# Altium PCB MB672.PCBDOC (part 2 of 4)
Units mil, origin at the board's own origin, x right, y up, seen from the top; angles counter-clockwise.
Board outline 4505 x 6805 mil, 4 copper layers (TopLayer, GND, VCC, BottomLayer); 337 components, 289 nets, 1516 pads, 621 vias.
Unrouted connection lines stored in the file: 28.
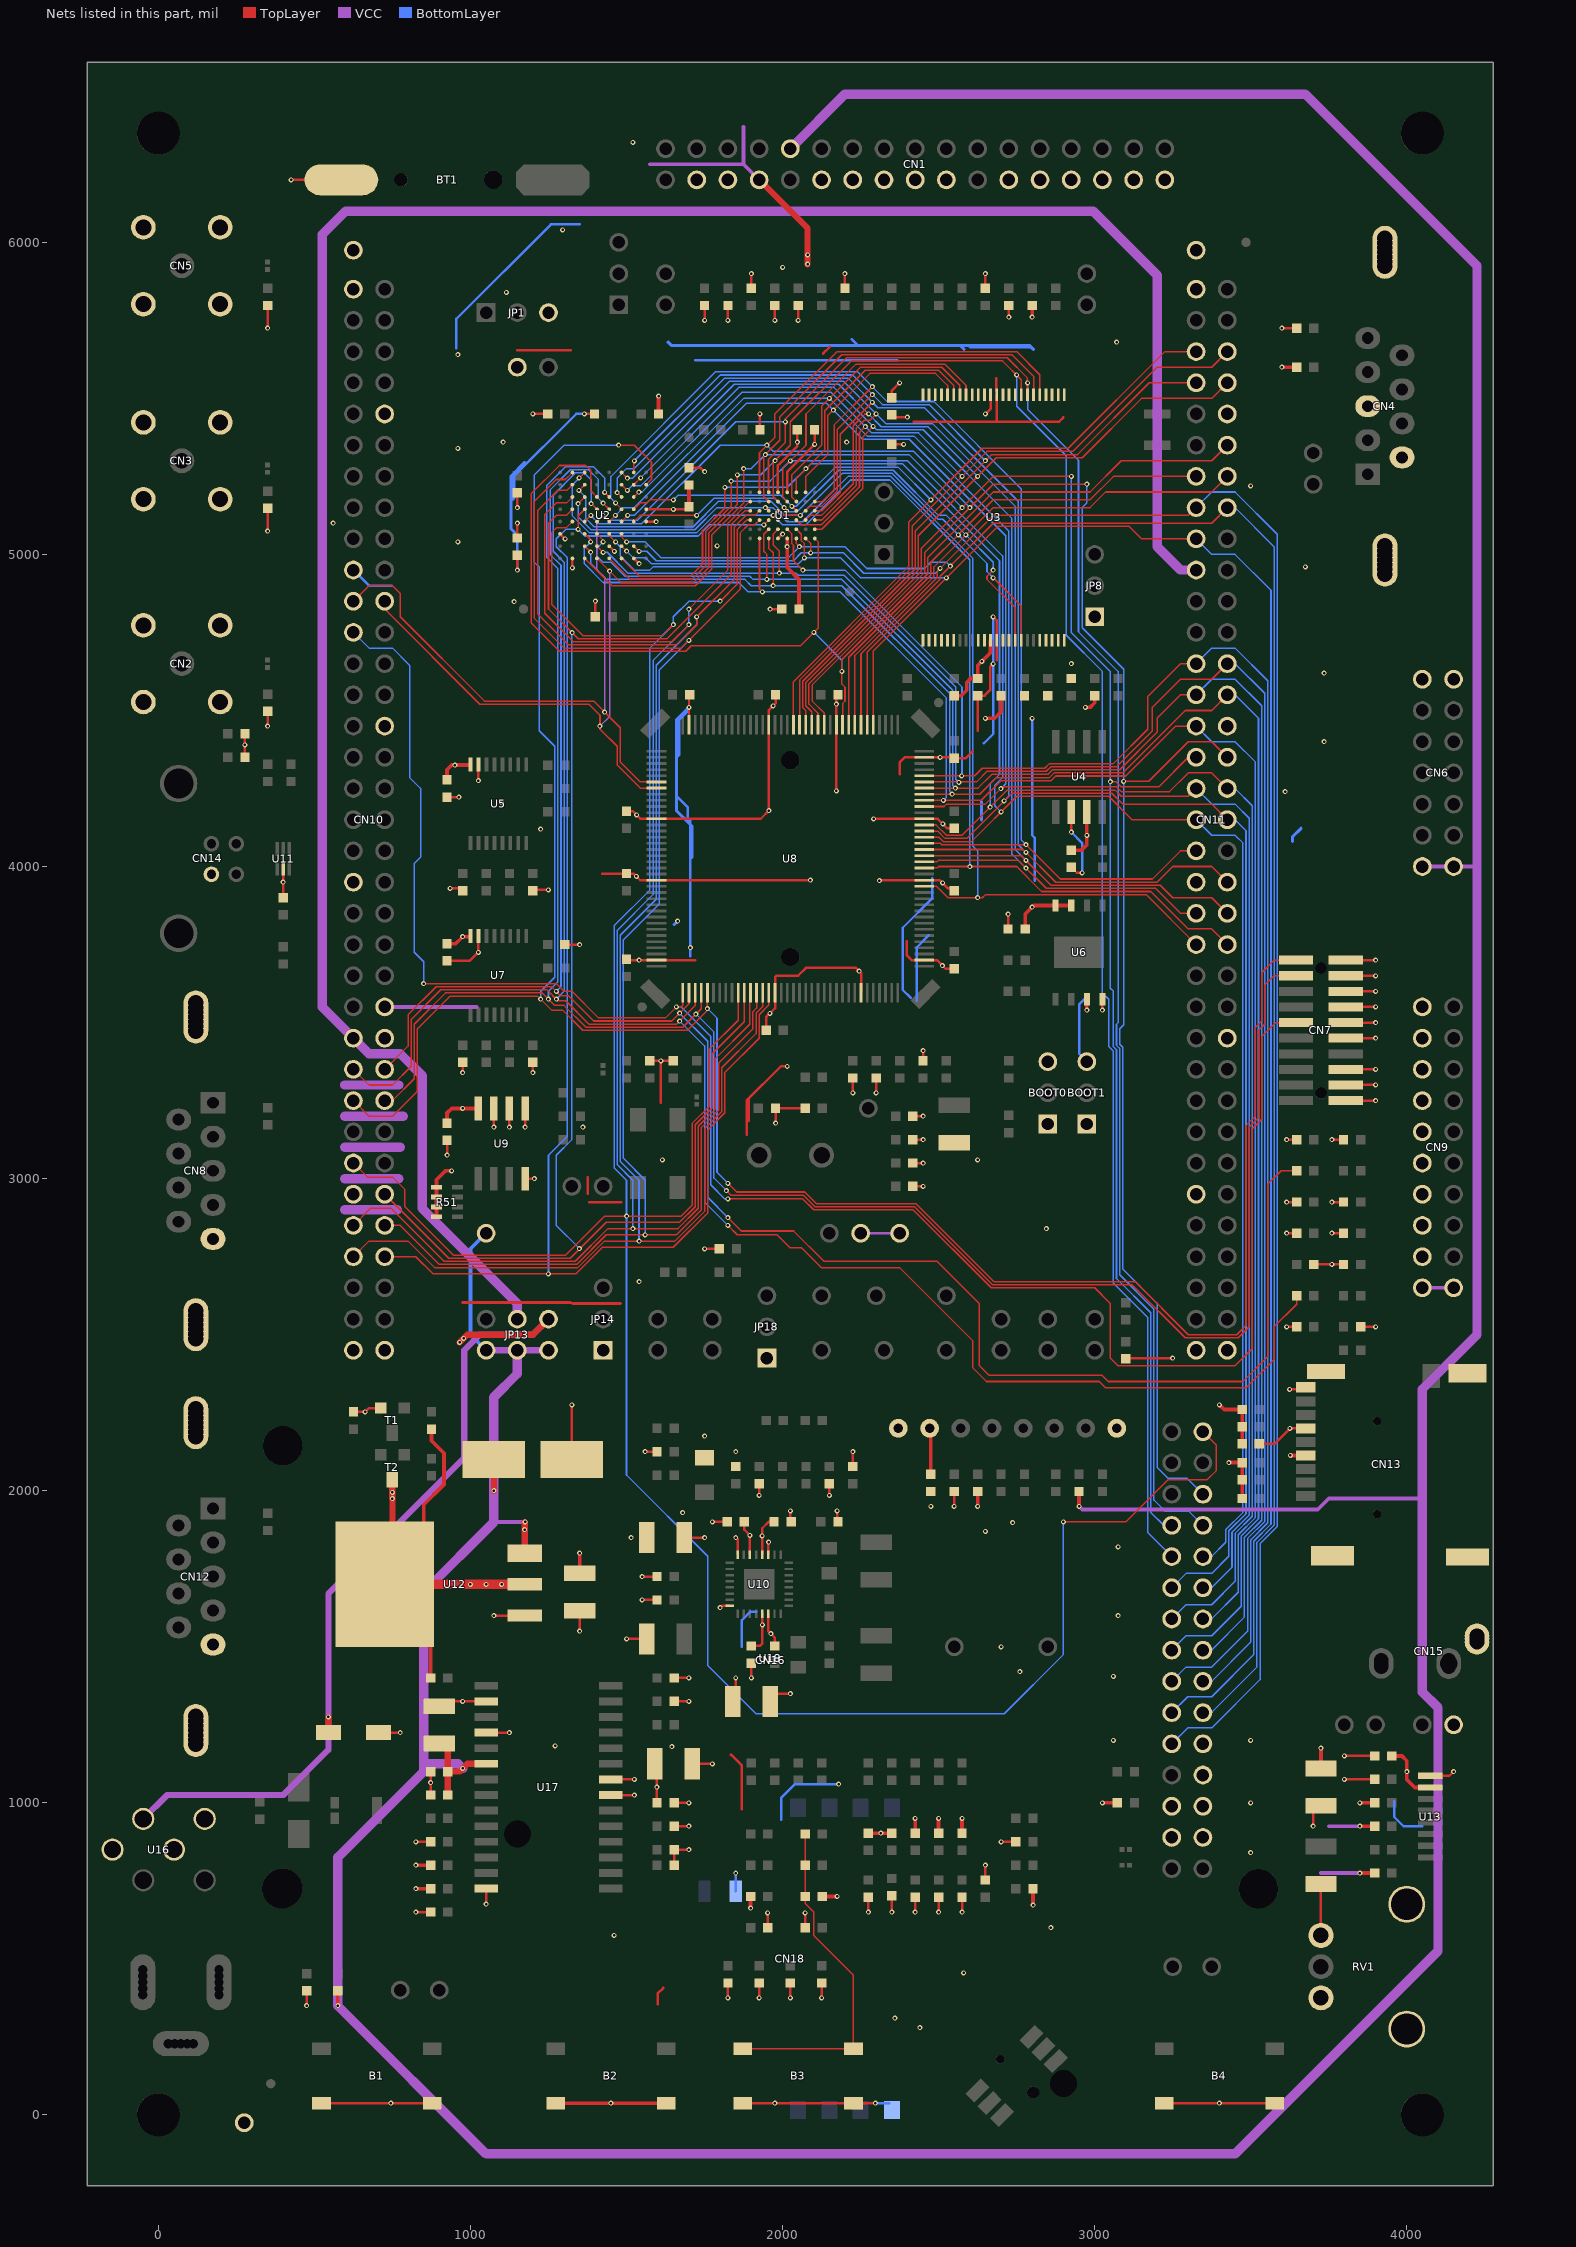
[diagram p4: the nets of this part, all layers, seen from the top]

## Via types
v1: diameter 16, hole 8, TopLayer to BottomLayer, tented both sides, 621 vias

## Nets (pads, with @x,y where several pads share a name; then routed paths per layer and width w, separated by ;. In a path a pad name is that pad's centre, name@x,y a point inside that pad or via, vN(x,y) a via of type N, cw(c..) or ccw(c..) an arc to the next point about the centre after c; other vN are vias at no path point)
+3V3: B2.1 B2.4 BOOT0.1 BOOT1.1 C11.1 C12.1 C14.2 C15.2 C16.1 C20.2 C24.2 C27.2 C34.2 C37.1 C49.2 C52.1 C62.2 C63.2 C64.1 C65.1 C68.1 C69.1 C71.1 C75.2 C79.1 C84.1 C88.2 CN1.28 CN7.1 CN9.1 CN9.2 CN10.48 CN10.69 CN11.69 CN13.4 CN16.24 CN16.25 CN16.28 JP1.3 JP12.2 R7.2 R10.1 R12.1 R13.2 R16.1 R17.2 R18.2 R19.1 R20.2 R23.2 R24.1 R27.2 R51.1 R51.3 R51.5 R51.7 R53.2 R55.2 R58.2 R59.2 R64.2 R66.2 R76.2 R83.2 R85.1 R88.2 R90.1 R91.1 R92.1 R93.1 R107.2 R109.1 R112.2 R113.1 R114.2 R115.2 R116.2 R118.1 R119.2 R120.1 R121.2 R122.2 R130.1 R131.1 R132.1 R133.1 R134.1 RV1.3 T2.3 TP5.1 U1.D6 U1.E1 U2.D8 U2.F1 U2.G5 U3.12 U3.37 U4.3 U5.16 U6.3 U6.7 U6.8 U7.16 U9.8 U10.4 U10.6 U10.8 U10.21 U12.2 U13.7 U17.21 U18.2 | length 8606.8
  TopLayer w8: v1@749.5,1975.5 v1(750,1975) ; C15.2@1150,5045 v1(1150,5100) ; v1(1150,5150) R18.2@1150,5197.5 ; v1(1200,5450) R12.1@1247.5,5450 ; U2.F1@1287.2,5065.94 v1(1303.15,5050) ; R20.2@1400,4800 v1(1400,4850) ; U2.G5@1444.68,5026.57 v1(1461.26,5010) ; U17.21@1450,1025 v1(1525,1025) ; v1(1550,1650) R83.2@1597.5,1650 ; U2.D8@1562.8,5144.69 R19.1@1704.68,5144.68 ; C88.2@1597.5,1000 C84.1@1597.5,1117.5 ; R93.1@1652.5,1325 v1(1700,1325) ; R91.1@1652.5,1400 v1(1700,1400) ; R109.1@1655,925 v1@1702.5,925 ; C65.1@1685,1850 v1(1750,1850) ; C79.1@1850,1340 v1(1850,1400) ; v1(1850,1850) 1856.1,1843.9 U10.8@1856.1,1794.49 ; C62.2@1877.5,1900 1877.5,1875 v1(1895.47,1857.03) U10.6@1895.47,1794.49 ; C75.2@1900,1502.5 1927.5,1502.5 1934.84,1509.84 U10.21@1934.84,1605.51 ; R16.1@1927.5,5400 v1(1927.5,5450) ; U10.4@1934.84,1794.49 1934.84,1879.84 1955,1900 C63.2@1972.5,1900 ; U1.D6@1985.24,5198.82 1985.24,5285.24 2047.5,5347.5 C12.1@2047.5,5400 ; R17.2@2350,5352.5 v1(2387.5,5352.5) ; C11.1@2350,5440 v1(2400,5440) ; v1(2650.1,5450.1) 2666.54,5466.54 U3.37@2666.54,5512.4 ; R58.2@3702.5,2725 R59.2@3797.5,2725 ; v1(3760,2825) R55.2@3797.5,2825 ; v1(3760,2925) R53.2@3797.5,2925 ; CN7.1@3805,3250 v1(3900,3250) ; R64.2@3852.5,2525 v1(3900,2525)
  TopLayer w12: v1(825,725) R119.2@872.5,725 ; v1(825,800) R118.1@872.5,800 ; U12.2@850,1880 850,1955 915,2020 915,2120 875,2160 R66.2@875,2197.5 ; R90.1@872.5,1400 U12.2@872.5,1527.5 ; R51.7@891.5,2877.76 891.5,2996.5 920,3025 v1(940,3025) ; C49.2@925,3177.5 925,3210 940,3225 U9.8@1025,3225 ; C37.1@925,3752.5 952.5,3752.5 v1(975,3775) U7.16@998.03,3775 ; C24.2@925,4277.5 925,4310 940,4325 U5.16@998.03,4325 ; B2.1@1272.83,37.5 B2.4@1627.17,37.5 ; C69.1@1350,1735 v1(1350,1800) ; R13.2@1602.5,5450 v1(1602.5,5507.5) ; R19.1@1700,5152.5 C14.2@1700,5222.5 ; v1(1897.5,662.5) R120.1@1897.5,700 ; U1.E1@2014.76,5051.18 2014.76,4957.74 2052.5,4920 C16.1@2052.5,4825 ; R121.2@2127.5,700 v1(2175,700) ; R112.2@2275,902.5 R113.1@2350,902.5 ; R114.2@2425,902.5 v1(2425,950) ; C64.1@2475,2052.5 U18.2@2475,2196.06 ; R115.2@2500,902.5 v1(2500,950) ; R23.2@2550,4547.5 2572.5,4547.5 2590,4565 2590,4590 2602.5,4602.5 C20.2@2625,4602.5 2625,4643.46 2666.54,4685 U3.12@2666.54,4725 ; R116.2@2575,902.5 v1(2575,950) ; v1(2625,1950) R76.2@2625,1997.5 ; v1(2650,4475) 2680,4475 2700,4495 R24.1@2700,4547.5 ; C34.2@2777.5,3800 2777.5,3847.5 2805,3875 U6.7@2925,3875 ; v1(2800,5760) R7.2@2800,5797.5 ; v1(2802.5,672.5) R122.2@2802.5,725 ; C27.2@2925,4052.5 2957.5,4052.5 2975,4070 U4.3@2975,4175 ; v1(2970,4510) 2985,4510 3000,4525 R27.2@3000,4547.5 ; v1(2975,3540) U6.3@2975,3575 ; v1(3025,1000) R107.2@3072.5,1000 ; v1(3400,2275) 3415,2260 R131.1@3472.5,2260 C52.1@3472.5,2150 ; v1(3430,2090) R134.1@3472.5,2090 R132.1@3472.5,1975 ; v1(3600,5600) R10.1@3647.5,5600 ; v1(3627.01,2112.99) CN13.4@3676.65,2112.99 ; C71.1@3725,1110 v1(3725,1175) ; v1(3850,775) R92.1@3897.5,775 ; v1(3850,925) R88.2@3897.5,925 ; v1(3850,1000) R85.1@3897.5,1000 ; C68.1@3952.5,1150 3985,1150 4000,1135 4000,1075 4025.59,1049.41 U13.7@4075,1049.41
  TopLayer w20: v1@749.5,1975.5 T2.3@749.5,2035 ; U12.2@750,1710 v1(750,1975) ; CN1.28@1925,6200 2080,6045 v1(2080,5930)
  TopLayer w30: U12.2@730,1700 U12.2@1173.82,1700
  VCC w8: JP12.2@2250,2825 TP5.1@2375,2825
  VCC w12: CN10.48@725,3550 1020,3550 ; 1575,6250 1875,6250 ; 1875,6370 1875,6250 ; CN1.28@1925,6200 1875,6250 ; 3725,775 v1(3850,775) ; 3750,925 v1(3850,925) ; CN9.2@4050,2650 CN9.1@4150,2650
  other v1: 1450,37.5 2315,902.5 1700,925 1597.5,1050 4000,1100 1935,1570 1000,1700 1050,1700 1100,1700 1934.84,1855 749.5,1995 3760,2725 975,3225 2800,3870 2975,4100 950,4325 2638.69,4657.15 2014.76,5025 1650,5144.69 2047.5,5360 2080,5960
+5V: C61.1 C82.1 C83.1 C86.1 CN1.25 CN6.1 CN6.2 JP13.1 JP13.3 JP13.5 R79.1 R127.2 TP4.1 U12.3 U17.6 | length 17048.1
  TopLayer w12: v1(575,350) R127.2@575,397.5 ; v1(2950,1950) R79.1@2950,1997.5
  TopLayer w20: C86.1@927.5,1025 C82.1@927.5,1187.5 ; C83.1@927.5,1100 965,1100 990,1125 U17.6@1050,1125 ; v1(1075,2000) C61.1@1075,2100 ; U12.3@1173.82,1800 v1@1173.82,1898.82
  VCC w12: 1075,1900 v1(1175,1900) ; v1(2950,1950) 2960,1940 3715,1940 3750,1975 4050,1975 ; CN6.2@4050,4000 4220,4000
  VCC w20: JP13.1@1050,2450 JP13.5@1250,2450
  VCC w30: 850,1125 960,1125 v1(975,1110) ; JP13.3@1150,2450 1150,2375 1075,2300 1075,1900 850,1675 850,1100 575,825 v1(575,350) 1050,-125 3450,-125 4100,525 4100,1305 4050,1355 4050,2325 4225,2500 4225,5925 3675,6475 2200,6475 CN1.25@2025,6300
  BottomLayer w12: JP13.1@1050,2450 1000,2500 1000,2775 TP4.1@1050,2825
  other v1: 1173.82,1875
A0: CN10.57 CN16.2 U1.A3 U2.E2 U8.10 | length 9253.4
  TopLayer w5: CN10.57@625,3050 670,3005 750,3005 790,2965 790,2910 945,2755 1305,2755 1430,2880 1675,2880 1710,2915 1710,3176.42 1765,3231.42 1765,3415 1857.68,3507.68 U8.10@1857.68,3595.87 ; U2.E2@1326.57,5105.32 1306.26,5085 1275,5085 1260,5070 1260,4840 1360,4740 1615,4740 v1(1649.93,4774.93) ; v1(1800,4850) 1855,4905 1855,5080 1885.24,5110.24 U1.A3@1896.65,5110.24 ; v1(2900,1900) 3100,1900 3235,2035 3360,2035 3390,2065 3390,2146 CN16.2@3347,2189
  BottomLayer w5: v1(1800,4850) 1700,4850 1649.93,4799.93 v1(1649.93,4774.93) 1575,4700 1575,3925 1460,3810 1460,3035 1500,2995 1500,2050 1760,1790 1760,1440 1915,1285 2710,1285 2900,1475 v1(2900,1900)
  other v1: 1500,2880
A1: CN10.60 U1.A4 U2.D2 U8.11 | length 5243.3
  TopLayer w5: CN10.60@725,2950 930,2745 1320,2745 1435,2860 1670,2860 1720,2910 1720,3172.28 1775,3227.28 1775,3400 1877.36,3502.36 U8.11@1877.36,3595.87 ; U2.D2@1326.57,5144.69 1306.89,5125 1275,5125 1250,5100 1250,4825 1345,4730 1630,4730 1835,4935 1835,5095 1879.76,5139.76 U1.A4@1896.65,5139.76
  BottomLayer w5: v1@1325,4748.94 1325,3125 1275,3075 1275,2850 v1(1349.13,2775.87)
  other v1: 1325.53,4749.47
A2: CN10.61 U1.A5 U2.C2 U8.12 | length 5502.1
  TopLayer w5: CN10.61@625,2850 680,2905 745,2905 915,2735 1336,2735 1441,2840 1665,2840 1730,2905 1730,3168.14 1785,3223.14 1785,3385 1895,3495 U8.12@1895,3593.82 ; U2.C2@1326.57,5184.06 1307.52,5165 1275,5165 1238.15,5128.15 1238.15,4811.85 1330,4720 1645,4720 v1(1700,4775) ; v1(1700,4825) 1825,4950 1825,5100 U1.A5@1894.29,5169.29
  BottomLayer w5: v1(1520,2840) 1520,2995 1470,3045 1470,3795 1585,3910 1585,4660 v1(1700,4775) v1(1700,4825)
A3: CN10.62 U1.B3 U2.A2 U8.13 | length 5500.2
  TopLayer w5: CN10.62@725,2850 775,2850 900,2725 1340.15,2725 1435.15,2820 1660,2820 1740,2900 1740,3164 1795,3219 1795,3370 1905,3480 1905,3535 1916.73,3546.73 U8.13@1916.73,3595.87 ; U2.A2@1326.57,5262.8 1303.78,5240 1275,5240 1205,5170 1205,4795 1300,4700 1675,4700 1865,4890 1865,5070 1890,5095 1910.94,5095 U1.B3@1926.18,5110.24
  BottomLayer w5: v1(1560,2820) 1560,2995 1490,3065 1490,3765 1605,3880 1605,4630 v1(1700,4725)
A4: CN10.63 U1.B4 U2.B2 U8.14 | length 5679.8
  TopLayer w5: CN10.63@625,2750 675,2800 800,2800 885,2715 1344.29,2715 1429.29,2800 1655,2800 1750,2895 1750,3159.85 1805,3214.85 1805,3355 1915,3465 1915,3530 1936.42,3551.42 U8.14@1936.42,3595.87 ; U2.B2@1326.57,5223.43 1308.15,5205 1280,5205 1215,5140 1215,4810 1315,4710 1660,4710 1725,4775 v1(1725,4800) 1845,4920 1845,5088.11 1881.89,5125 1911.42,5125 U1.B4@1926.18,5139.76
  BottomLayer w5: v1(1540,2800) 1540,2995 1480,3055 1480,3780 1595,3895 1595,4645 1725,4775 v1(1725,4800)
A5: CN10.64 U1.C3 U2.D3 U8.15 | length 5116.4
  TopLayer w5: CN10.64@725,2750 825,2750 880,2695 1338.43,2695 1423.43,2780 1650,2780 1760,2890 1760,3155.71 1815,3210.71 1815,3340 1925,3450 1925,3525 1956.1,3556.1 U8.15@1956.1,3595.87 ; v1(1345,5080) 1345,5123.74 U2.D3@1365.94,5144.69 ; v1(1940.47,5095) U1.C3@1955.71,5110.24
  BottomLayer w5: v1(1250,2695) 1250,3075 1310,3135 1310,4990 1275,5025 1275,5050 1305,5080 v1(1345,5080) 1366,5059 1730,5059 1766,5095 v1(1940.47,5095)
A6: CN11.43 U1.C4 U2.C3 U8.50 | length 3635.7
  TopLayer w5: v1(1345,5163.11) U2.C3@1365.94,5184.06 ; v1(1945,5150) U1.C4@1955.24,5139.76 ; U8.50@2454.13,3936.42 2493.58,3936.42 2530,3900 2640,3900 2650,3910 3165,3910 CN11.43@3325,3750
  BottomLayer w5: v1(1345,5163.11) 1345,5120 1386,5079 1719,5079 1790,5150 1968.94,5150 2013.94,5105 2065,5105 2210,5250 2346.72,5250 2610,4986.72 2610,4065 2625,4050 v1(2625,3900)
A7: CN11.44 U1.D4 U2.A3 U8.53 | length 3732.5
  TopLayer w5: v1(1348.15,5245) U2.A3@1365.94,5262.8 ; v1@1970.47,5125 U1.D4@1985.24,5139.76 ; U8.53@2454.13,3995.47 2495.47,3995.47 2500,4000 2750,4000 2830,3920 3180,3920 3300,3800 3375,3800 CN11.44@3425,3750
  BottomLayer w5: v1(1348.15,5245) 1326.57,5223.43 1326.57,5123.43 1381,5069 1724,5069 1780,5125 v1(1970,5125) 2000,5095 2075,5095 2218.57,5238.57 2344.01,5238.57 2600,4982.57 v1(2600,4000)
A8: CN11.41 U1.H2 U2.B6 U8.54 | length 4070.6
  TopLayer w5: U2.B6@1484.06,5223.43 v1(1502.48,5205) ; U1.H2@2103.35,5080.71 2125.71,5080.71 2256.54,5211.54 2256.54,5376.54 v1(2290,5410) ; U8.54@2454.13,4015.16 2495,4015.16 2499.52,4019.67 2755.33,4019.67 2845,3930 3195,3930 3275,3850 CN11.41@3325,3850
  BottomLayer w5: v1(1502.48,5205) 1517.1,5219.61 1544.61,5219.61 1860,5535 2165,5535 2300.8,5399.2 2450.8,5399.2 2735,5115 2735,4040 v1(2780,3995)
A9: CN11.42 U1.H3 U2.A6 U8.55 | length 4204.7
  TopLayer w5: U2.A6@1484.06,5262.8 v1(1502.48,5244.37) ; U1.H3@2103.35,5110.24 2125.24,5110.24 2236.54,5221.54 2236.54,5405 2261.4,5429.86 2279.86,5429.86 v1(2300.01,5449.99) ; U8.55@2454.13,4034.84 2765.16,4034.84 2860,3940 3210,3940 3250,3900 3375,3900 CN11.42@3425,3850
  BottomLayer w5: v1(1502.48,5244.37) 1519.37,5244.37 1830,5555 2195,5555 2330.8,5419.2 2480.8,5419.2 2745,5155 2745,4055 v1(2780,4020)
A10: CN11.40 U1.H4 U2.C6 U8.56 | length 4275.8
  TopLayer w5: v1(1470,5198.11) U2.C6@1484.06,5184.06 ; U1.H4@2103.35,5139.76 2125.62,5139.76 2185,5199.14 2185,5385 v1@2287.39,5487.39 ; U8.56@2454.13,4054.53 2770.47,4054.53 2875,3950 3200,3950 3250,4000 3375,4000 CN11.40@3425,3950
  BottomLayer w5: v1(1470,5198.11) 1470,5245 1500,5275 1525,5275 1815,5565 2210,5565 2305,5470 2455,5470 2755,5170 2755,4070 v1(2780,4045)
  other v1: 2287.61,5487.39
A11: CN11.37 U1.H5 U2.D6 U8.57 | length 4288.4
  TopLayer w5: v1(1465,5165) 1484.06,5145.94 U2.D6@1484.06,5144.69 ; U1.H5@2103.35,5169.29 2126.86,5169.29 2165,5207.43 2165,5415 v1(2287.5,5537.5) ; U8.57@2454.13,4074.21 2505.79,4074.21 2510,4070 v1(2780,4070) 2890,3960 3185,3960 3275,4050 CN11.37@3325,4050
  BottomLayer w5: v1(1465,5165) 1450,5180 1450,5250 1785,5585 2240,5585 2335,5490 2485,5490 2765,5210 2765,4085 v1(2780,4070)
A12: CN11.8 U1.G3 U2.B7 U8.87 | length 3764
  TopLayer w5: U2.B7@1523.43,5223.43 v1(1545,5245) ; U1.G3@2073.82,5110.24 2088.58,5125 2125,5125 2226.54,5226.54 2226.54,5412.39 2264.14,5450 v1(2275.39,5450) ; U8.87@2093.9,4454.13 2093.9,4496.1 2074.53,4515.47 2074.53,4589.67 2435,4950.15 2435,5060 2685,5310 2960,5310 3150,5500 3375,5500 CN11.8@3425,5550
  BottomLayer w5: v1(1545,5245) 1845,5545 2180,5545 v1@2275,5450 ; v1@2275.2,5449.8 2315.8,5409.2 2465.8,5409.2 v1(2625,5250)
A13: CN11.7 U1.G4 U2.A7 U8.88 | length 3742.4
  TopLayer w5: U2.A7@1523.43,5262.8 v1@1523.43,5298.43 ; U1.G4@2073.82,5139.76 2089.06,5155 2126.72,5155 2175,5203.28 2175,5400 v1@2287.21,5512.21 ; U8.88@2074.21,4454.13 2074.21,4500 2064.53,4509.68 2064.53,4593.82 2425,4954.29 2425,5075 2670,5320 2945,5320 3175,5550 CN11.7@3325,5550
  BottomLayer w5: v1(1525,5300) 1800,5575 2225,5575 2320,5480 2470,5480 2649.8,5300.2 v1(2650.2,5300.2)
  other v1: 2287.79,5512.21
A14: CN11.6 U1.F3 U2.C7 U8.89 | length 3789.6
  TopLayer w5: U2.C7@1523.43,5184.06 v1(1539.37,5200) ; U1.F3@2044.29,5110.24 2059.53,5095 2125,5095 2246.54,5216.54 2246.54,5391.24 v1@2265.16,5409.86 ; U8.89@2054.53,4454.13 2054.53,4597.96 2415,4958.43 2415,5090 2655,5330 2930,5330 3200,5600 3375,5600 CN11.6@3425,5650
  BottomLayer w5: v1(1539.37,5200) 1550,5200 1870,5520 2155,5520 2285.8,5389.2 2435.8,5389.2 v1(2575,5250)
  other v1: 2265.16,5409.84
A15: CN11.5 U1.F4 U2.D7 U8.90 | length 3052
  TopLayer w5: U2.D7@1523.43,5144.69 1543.74,5165 1565,5165 1575,5175 v1(1650,5175) ; v1(2030,5154.06) U1.F4@2044.29,5139.76 U1.F4@2044.29,5140.71 ; U8.90@2034.84,4454.13 2034.84,4592.42 2405,4962.57 2405,5105 2640,5340 2915,5340 3225,5650 CN11.5@3325,5650
  BottomLayer w5: v1(1650,5175) 1665,5190 1994.06,5190 v1(2030,5154.06) 2043.53,5154.06 2169.48,5280 2370,5280 v1(2475,5175)
A16: CN11.14 U1.E4 U2.E7 U3.16 U8.80 | length 3358.3
  TopLayer w5: U2.E7@1523.43,5105.32 1543.11,5125 v1(1725,5125) ; v1(2005,5150) 2014.76,5140.24 U1.E4@2014.76,5139.76 ; U8.80@2231.69,4454.13 2231.69,4676.13 2485,4929.44 2485,4960 2675,5150 2985,5150 3035,5200 3375,5200 CN11.14@3425,5250 ; v1(2675,4950) 2655,4930 2655,4920 2745.28,4829.72 U3.16@2745.28,4725
  BottomLayer w5: v1(1725,5125) 1780,5180 1975,5180 2017.78,5137.22 2047.22,5137.22 2180,5270 2355,5270 2500,5125 2525.01,5125 v1(2587.5,5062.5) 2675,4975 v1(2675,4950)
A17: CN11.13 U1.D3 U2.B3 U3.17 U8.81 | length 3611.8
  TopLayer w5: v1(1347.52,5205) U2.B3@1365.94,5223.43 ; U1.D3@1985.24,5110.24 2000,5125 v1(2057,5125) ; U8.81@2212.01,4454.13 2212.01,4670.59 2475,4933.58 2475,4974.56 v1(2563.09,5062.65) ; v1@2562.87,5062.87 2675,5175 2985,5175 3060,5250 CN11.13@3325,5250 ; v1(2675,4925) 2764.96,4835.04 U3.17@2764.96,4725
  BottomLayer w5: v1(1347.52,5205) 1370,5182.52 1370,5115 1396,5089 1714,5089 1795,5170 1963.08,5170 2008.08,5125 v1(2057,5125) 2192,5260 2350.86,5260 2498.01,5112.85 2512.89,5112.85 2655,4970.74 2655,4945 v1(2675,4925)
A18: CN11.12 U1.H1 U2.C4 U8.82 | length 3951
  TopLayer w5: U2.C4@1405.31,5184.06 1385,5204.37 1385,5270 1370,5285 1285,5285 1195,5195 1195,4780 1285,4690 1690,4690 1707.54,4707.54 2057.54,4707.54 2115,4765 2115,5039.53 U1.H1@2103.35,5051.18 ; U8.82@2192.32,4454.13 2192.32,4522.32 2200,4530 2200,4575 2190,4585 2190,4662.72 2465,4937.72 2465,4990 2675,5200 2985,5200 3085,5300 3375,5300 CN11.12@3425,5350
  BottomLayer w5: v1(2100.52,4750.52) 2190,4661.05 v1(2190,4625)
A19: CN10.52 R49.2 U2.D5 U8.2 | length 6656.8
  TopLayer w5: CN10.52@725,3350 800,3425 800,3525 890,3615 1260,3615 v1@1274,3601 ; v1(1275,3600) 1288.85,3586.15 1313.85,3586.15 1395,3505 1645,3505 v1(1670,3530) ; v1(1425,5164.37) U2.D5@1444.68,5144.69 ; v1@1670.1,3529.9 1700.2,3560 U8.2@1700.2,3595.87 ; v1(1825,2875) 1867.82,2832.18 2035.25,2832.18 2132.43,2735 2495,2735 2630,2600 2630,2401.57 2661.57,2370 3023.28,2370 3043.28,2350 3475,2350 3555,2430 3555,2982.5 3597.5,3025 R49.2@3647.5,3025
  BottomLayer w5: v1(1275,3600) 1290,3615 1290,4965 1255,5000 1255,5206.52 1320,5271.52 1378.48,5271.52 1410,5240 1410,5179.37 v1(1425,5164.37) ; v1(1670,3530) 1760,3440 1760,2940 v1(1825,2875)
A20: CN10.51 R60.2 U2.D4 U8.3 | length 6351
  TopLayer w5: CN10.51@625,3350 675,3300 750,3300 810,3360 810,3510 905,3605 1245,3605 1280,3570 1305,3570 1380,3495 1660,3495 1719.88,3554.88 U8.3@1719.88,3595.87 ; v1(1386.86,5163.14) U2.D4@1405.32,5144.68 ; v1(1825,2850) 1855,2820 1982.18,2820 2024.02,2778.16 2060.98,2778.16 2124.14,2715 2375,2715 2610,2480 2610,2393.28 2653.28,2350 3015,2350 3035,2330 3485,2330 3575,2420 3575,2525 3647.5,2597.5 R60.2@3647.5,2625
  BottomLayer w5: v1(1275,3575) 1300,3600 1300,4975 1265,5010 1265,5190 1336.52,5261.52 1363.48,5261.52 1386.86,5238.14 v1(1386.86,5163.14) ; v1(1670,3505) 1750,3425 1750,2925 v1(1825,2850)
A21: CN7.18 CN10.54 U2.C5 U8.4 | length 7066
  TopLayer w5: CN10.54@725,3250 750,3250 820,3320 820,3495 920,3595 1230,3595 1270,3555 1300,3555 1370,3485 1680,3485 1739.57,3544.57 U8.4@1739.57,3595.87 ; v1(1430,5198.74) U2.C5@1444.68,5184.06 ; v1(1820,2961.79) 1834.72,2947.07 2067.07,2947.07 2104.14,2910 2422.43,2910 2672.43,2660 3120,2660 3290,2490 3460,2490 3495,2525 3495,3165 3525,3195 3525,3475 3545,3495 3545,3620 3575,3650 CN7.18@3645,3650
  BottomLayer w5: v1(1250,3575) 1250,3600 1280,3630 1280,4955 1245,4990 1245,5221.52 1305,5281.52 1393.48,5281.52 1430,5245 v1(1430,5198.74) ; v1(1722.37,3527.37) 1780,3469.74 1780,3001.79 v1(1820,2961.79)
A22: CN7.20 CN10.53 U2.B8 U8.5 | length 7540.5
  TopLayer w5: CN10.53@625,3250 675,3200 750,3200 830,3280 830,3480 935,3585 1215,3585 1259.85,3540.15 1294.85,3540.15 1360,3475 1695,3475 1759.25,3539.25 U8.5@1759.25,3595.87 ; v1(1475,5350) 1525,5350 1580,5295 1580,5240.63 U2.B8@1562.8,5223.43 ; v1(1825,2985) 1852.93,2957.07 2071.21,2957.07 2108.28,2920 2426.57,2920 2676.57,2670 3130,2670 3300,2500 3455,2500 3485,2530 3485,3170 3515,3200 3515,3485 3535,3505 3535,3660 3575,3700 CN7.20@3645,3700
  BottomLayer w5: v1(1225,3575) 1225,3600 1270,3645 1270,4385 1220,4435 1220,4960 1203.91,4976.09 1203.91,5253.91 1300,5350 v1(1475,5350) ; v1(1759.25,3545) 1790,3514.25 1790,3020 v1(1825,2985)
A23: CN7.12 CN10.23 U8.1 | length 6077.9
  TopLayer w5: v1(850,3625) 1275,3625 1300,3600 1325,3600 1410,3515 1625,3515 v1(1660,3550) 1675,3550 1680.51,3555.51 U8.1@1680.51,3595.87 ; v1(1825,2935) 2065,2935 2100,2900 2418.28,2900 2668.28,2650 3000,2650 3050,2600 3050,2425 3075,2400 3450,2400 3505,2455 3505,3160 3535,3190 3535,3455 3580,3500 CN7.12@3645,3500
  BottomLayer w5: CN10.23@625,4750 675,4700 750,4700 805,4645 805,4285 840,4250 840,4030 820,4010 820,3725 850,3695 v1(850,3625) ; v1(1660,3550) 1675,3550 1770,3455 1770,2980 1815,2935 v1(1825,2935)
D0: CN11.32 CN16.6 U1.B6 U2.E3 U3.29 U8.85 | length 7918.9
  TopLayer w5: U2.E3@1365.94,5105.32 v1(1385.63,5125) ; U1.B6@1926.18,5198.82 1926.18,5326.18 1975,5375 1975,5450 2175,5650 2750,5650 2824.02,5575.98 U3.29@2824.02,5512.4 ; U8.85@2133.27,4454.13 2133.27,4491.73 2094.53,4530.47 2094.53,4581.39 2455,4941.86 2455,5005 2675,5225 v1(2975,5225) ; v1(3093.14,4273.14) 3173.14,4273.14 3300,4400 3375,4400 CN11.32@3425,4350
  BottomLayer w5: v1(1385.63,5125) 1411.63,5099 1549,5099 1800,5350 v1(1950,5350) 1970,5330 2420,5330 v1(2600,5150) ; v1(2975,5225) 2975,5165 2960,5150 2960,4765 3093.14,4631.86 3093.14,3493.14 3080,3480 3080,3430.86 3090,3420.86 3090,2710 3200,2600 3200,2075 3235,2040 3296,2040 CN16.6@3347,1989
D1: CN11.31 CN16.7 U1.C5 U2.H3 U3.30 U8.86 | length 8033.4
  TopLayer w5: U2.H3@1365.94,4987.2 1453.15,4900 1720,4900 1773.46,4953.46 1773.46,5062.61 1875,5164.14 v1(1875,5275) ; U1.C5@1955.71,5169.29 1940,5185 1940,5315 1990.61,5365.61 1990.61,5440.61 2190,5640 2735,5640 2804.33,5570.67 U3.30@2804.33,5512.4 ; U8.86@2113.58,4454.13 2113.58,4491.42 2084.53,4520.47 2084.53,4585.53 2445,4946 2445,5020 2675,5250 v1(2925,5250) ; v1(3050,4271.72) 3068.28,4271.72 3085,4255 3205,4255 3300,4350 CN11.31@3325,4350
  BottomLayer w5: v1(1875,5275) 1900,5275 v1(1944.69,5319.69) ; v1@1945,5320 2405,5320 v1(2575,5150) ; v1(2925,5250) 2925,4750 3050,4625 3050,3610 3060,3600 3060,3422.57 3070,3412.57 3070,2680 3180,2570 3180,1930 3221,1889 CN16.7@3247,1889
D2: CN10.21 CN16.8 U1.C6 U2.E4 U3.31 U8.114 | length 7894
  TopLayer w5: CN10.21@625,4850 675,4900 750,4900 775,4875 775,4800 1045,4530 1395,4530 1480,4445 1480,4335 1543.94,4271.06 U8.114@1595.87,4271.06 ; U2.E4@1405.32,5105.32 v1(1425,5125) ; U1.C6@1955,5199.53 1955,5305 2008.64,5358.64 2008.64,5433.64 2205,5630 2720,5630 2784.65,5565.35 U3.31@2784.65,5512.4
  VCC w5: v1(1425,5125) 1405,5105 1405,4950 1430,4925 v1(1430,4495)
  BottomLayer w5: v1(1425,5125) 1441,5109 1534,5109 1850,5425 v1(2008.64,5425) ; v1(2785,5550) 2785,5465 2948.2,5301.8 2948.2,4751.8 3075,4625 3075,3500 3070,3495 3070,3426.72 3080,3416.72 3080,2691.72 3190,2581.72 3190,1970 3225,1935 3301,1935 CN16.8@3347,1889
D3: CN10.22 CN16.9 U1.D5 U2.H4 U3.32 U8.115 | length 7758.6
  TopLayer w5: CN10.22@725,4850 725,4825 1030,4520 1380,4520 1414.94,4485.06 1414.94,4440.06 1470,4385 1470,4325 1543.62,4251.38 U8.115@1595.87,4251.38 ; U2.H4@1405.31,4987.2 1482.52,4910 1715,4910 1763.46,4958.46 1763.46,5068.46 1855,5160 v1(1855,5255) ; U1.D5@1985.24,5169.29 1970,5184.53 1970,5295 2025,5350 2025,5425 2220,5620 2705,5620 2764.96,5560.04 U3.32@2764.96,5512.4
  VCC w5: v1(1414.94,4450) 1446.03,4481.09 v1(1446.03,4946.49)
  BottomLayer w5: v1(1855,5255) 1930,5255 v1(1975.8,5300.8) ; v1(2750,5575) 2750,5475 2908.63,5316.37 2908.63,4741.37 3025,4625 3025,3595 3045,3575 3045,3423.43 3060,3408.43 3060,2665 3170,2555 3170,1866 CN16.9@3247,1789
D4: CN11.35 CN16.10 U1.E5 U2.H5 U3.41 U8.58 | length 6980.3
  TopLayer w5: U2.H5@1444.68,4987.2 1511.89,4920 1710,4920 1753.46,4963.46 1753.46,5072.61 1835,5154.14 v1(1835,5235) ; U1.E5@2014.76,5169.29 2000,5184.06 2000,5275 2075,5350 2075,5450 2235,5610 2520,5610 2587.8,5542.2 U3.41@2587.8,5512.4 ; U8.58@2454.13,4093.9 2501.1,4093.9 2515,4080 2605,4080 2750,4225 3045,4225 3120,4150 CN11.35@3325,4150
  BottomLayer w5: v1(1835,5235) 1960,5235 v1(2025,5300) 2400,5300 2705,4995 2705,4285 2680,4260 2680,4195 v1(2700,4175) ; CN11.35@3325,4150 3375,4100 3450,4100 3475,4075 3475,1930.56 3420,1875.56 3420,1835 3374,1789 CN16.10@3347,1789
D5: CN11.36 CN16.11 U1.F5 U2.E5 U3.42 U8.59 | length 7113.5
  TopLayer w5: U2.E5@1444.68,5105.32 v1(1464.37,5125) ; U1.F5@2044.29,5169.29 2030,5183.58 2030,5255 2125,5350 2125,5475 2250,5600 2510,5600 2568.11,5541.89 U3.42@2568.11,5512.4 ; U8.59@2454.13,4113.58 2497.28,4113.58 2520.86,4090 2590,4090 2735,4235 3055,4235 3090,4200 3375,4200 CN11.36@3425,4150
  BottomLayer w5: v1(1464.37,5125) 1489.37,5150 1525,5150 1875,5500 v1(2150,5500) 2270.8,5379.2 2420.8,5379.2 2725,5075 2725,4225 v1(2710,4210) ; CN16.11@3247,1689 3293,1735 3375,1735 3430,1790 3430,1871.42 3485,1926.42 3485,4115 3450,4150 CN11.36@3425,4150
D5V: CN10.49 CN11.19 JP13.4 | length 8491.5
  VCC w30: 596.61,2900 765,2900 ; 596.61,3000 770,3000 ; 596.61,3100 775,3100 ; 596.61,3200 785,3200 ; 596.61,3300 770,3300 ; JP13.4@1150,2550 1150,2600 845,2905 845,3330 775,3400 675,3400 525,3550 525,6025 600,6100 2995,6100 3200,5895 3200,5025 3275,4950 CN11.19@3325,4950
D6: CN11.33 CN16.12 U1.F6 U2.H6 U3.43 U8.60 | length 6948.7
  TopLayer w5: U2.H6@1484.06,4987.2 1541.26,4930 1705,4930 1743.46,4968.46 1743.46,5076.75 1815,5148.28 v1(1815,5215) ; U1.F6@2044.29,5198.82 2044.29,5244.29 2135,5335 2135,5460 2265,5590 2500,5590 2548.43,5541.57 U3.43@2548.43,5512.4 ; U8.60@2454.13,4133.27 2491.73,4133.27 2525,4100 2575,4100 2720,4245 3065,4245 3085,4225 3300,4225 CN11.33@3325,4250
  BottomLayer w5: v1(1815,5215) 2015,5215 2090,5290 2385,5290 2695,4980 2695,4295 2665,4265 v1(2665,4190) ; v1@2074.27,5275 v1(2074.64,5274.64) ; CN11.33@3325,4250 3375,4200 3450,4200 3495,4155 3495,1922.28 3440,1867.28 3440,1755 3374,1689 CN16.12@3347,1689
D7: CN11.34 CN16.13 U1.G6 U2.E6 U3.44 U8.63 | length 7053.2
  TopLayer w5: U2.E6@1484.06,5105.32 v1(1503.74,5125) ; U1.G6@2073.82,5198.82 2073.82,5248.82 2145,5320 2145,5445 2280,5580 2490,5580 2528.74,5541.26 U3.44@2528.74,5512.4 ; U8.63@2454.13,4192.32 2517.32,4192.32 2525,4200 2650,4200 2705,4255 3070,4255 3085,4240 3240,4240 3300,4300 3375,4300 CN11.34@3425,4250
  BottomLayer w5: v1(1503.74,5125) 1525,5125 1885,5485 2139.93,5485 2255.73,5369.2 2405.8,5369.2 2715,5060 2715,4265 v1(2699.83,4249.83) ; CN16.13@3247,1589 3293,1635 3375,1635 3450,1710 3450,1863.14 3505,1918.14 3505,4195 3450,4250 CN11.34@3425,4250
  other v1: 2162.47,5462.47
D8: CN11.29 CN16.14 U1.B1 U2.F3 U8.64 | length 5995.7
  TopLayer w5: U2.F3@1365.94,5065.94 1385,5046.89 v1(1385,5040) ; U1.B1@1926.18,5051.18 1926.18,4888.82 v1(1935,4880) ; U8.64@2454.13,4212.01 2637.01,4212.01 2700,4275 2860,4275 2875,4290 3100,4290 3260,4450 CN11.29@3325,4450
  BottomLayer w5: v1(1385,5040) 1365,5020 1365,4970 1425,4910 1860,4910 1890,4880 2185,4880 2525,4540 2525,4222.01 v1(2515,4212.01) ; CN11.29@3325,4450 3375,4400 3450,4400 3515,4335 3515,1914 3460,1859 3460,1675 3374,1589 CN16.14@3347,1589
D9: CN11.28 CN16.15 U1.C1 U2.G3 U8.65 | length 6253.2
  TopLayer w5: U2.G3@1365.94,5026.57 v1(1385,5007.52) ; U1.C1@1955.71,5051.18 1955.71,5019.29 1970,5005 v1(1970,4900) ; U8.65@2454.13,4231.69 2631.69,4231.69 2685,4285 2855,4285 2870,4300 3090,4300 3290,4500 3375,4500 CN11.28@3425,4550
  BottomLayer w5: v1(1385,5007.52) 1385,4970 1435,4920 1880,4920 1900,4900 2190,4900 2535,4555 2535,4240 v1(2543.31,4231.69) ; CN16.15@3247,1489 3293,1535 3375,1535 3470,1630 3470,1854.85 3525,1909.85 3525,4475 3450,4550 CN11.28@3425,4550
D10: CN11.27 CN16.16 U1.C2 U2.F4 U8.66 | length 6300.6
  TopLayer w5: U2.F4@1405.31,5065.94 1425,5046.26 v1(1425,5040) ; v1(1950,4920) 1950,5000 1940,5010 1940,5065 U1.C2@1955.71,5080.71 ; U8.66@2454.13,4251.38 2626.38,4251.38 2670,4295 2850,4295 2865,4310 3080,4310 3200,4430 3200,4475 3275,4550 CN11.27@3325,4550
  BottomLayer w5: v1(1425,5040) 1405,5020 1405,4995 1425,4975 1450,4975 1495,4930 1895,4930 1905,4920 2190,4920 2545,4565 2545,4260 v1(2553.62,4251.38) ; CN11.27@3325,4550 3375,4600 3450,4600 3535,4515 3535,1905.71 3480,1850.71 3480,1595 3374,1489 CN16.16@3347,1489
D11: CN11.26 CN16.17 U1.D2 U2.G4 U8.67 | length 6469.8
  TopLayer w5: U2.G4@1405.31,5026.57 v1(1425,5006.89) ; U1.D2@1985.24,5080.71 1970,5065.47 1970,5030 1990,5010 v1(1990,4940) ; U8.67@2454.13,4271.06 2621.06,4271.06 2655,4305 2845,4305 2860,4320 3070,4320 3185,4435 3185,4510 3275,4600 3375,4600 CN11.26@3425,4650
  BottomLayer w5: v1(1425,5006.89) 1438.11,5006.89 1505,4940 2043.39,4940 2050,4933.39 2196.61,4933.39 2555,4575 2555,4280 v1(2565,4270) ; CN16.17@3247,1389 3293,1435 3375,1435 3490,1550 3490,1846.57 3545,1901.57 3545,4555 3450,4650 CN11.26@3425,4650
D12: CN11.25 CN16.18 U1.E2 U2.F5 U8.68 | length 6482
  TopLayer w5: U2.F5@1444.68,5065.94 1444.68,5060.32 v1(1465,5040) ; U1.E2@2014.76,5080.71 2030,5065.47 2030,5035 2035,5030 2035,4980 v1(2065,4950) ; U8.68@2454.13,4290.75 2615.75,4290.75 2640,4315 2840,4315 2855,4330 3060,4330 3170,4440 3170,4545 3275,4650 CN11.25@3325,4650
  BottomLayer w5: v1(1465,5040) 1480,5025 1480,4995 1525,4950 1575,4950 1585,4960 2055,4960 v1(2065,4950) 2200,4950 2575,4575 v1@2575,4290.75 ; CN11.25@3325,4650 3375,4700 3450,4700 3555,4595 3555,1897.43 3500,1842.43 3500,1515 3374,1389 CN16.18@3347,1389
  other v1: 2574,4290.75
D13: CN11.17 CN16.19 U1.F2 U2.G6 U8.77 | length 6735.1
  TopLayer w5: U2.G6@1484.06,5026.57 v1(1500,5010.63) ; U1.F2@2044.29,5080.71 2060,5065 2060,5045 2070,5035 v1(2070,4989.21) ; U8.77@2290.75,4454.13 2290.75,4690.75 2690,5090 3110,5090 3150,5050 CN11.17@3325,5050
  BottomLayer w5: v1(1500,5010.63) 1520.63,4990 1560,4990 1580,4970 2050.79,4970 v1(2070,4989.21) 2185.79,4989.21 2250,4925 v1(2525,4925) ; CN16.19@3247,1289 3298,1340 3375,1340 3510,1475 3510,1838.28 3565,1893.28 3565,4885 3450,5000 3375,5000 CN11.17@3325,5050
D14: CN11.16 CN16.20 U1.F1 U2.F6 U8.78 | length 6809.7
  TopLayer w5: U2.F6@1484.06,5065.94 1484.06,5055.94 v1(1500,5040) ; U1.F1@2044.29,5051.18 2044.29,5034.71 v1(2054,5025) ; U8.78@2271.06,4454.13 2271.06,4687.21 2505,4921.15 2505,4930 v1@2537.5,4962.5 ; v1(2537.33,4962.67) 2537.67,4962.67 2675,5100 3375,5100 CN11.16@3425,5150
  BottomLayer w5: v1(1500,5040) 1560,5040 1610,4990 2019,4990 v1(2054,5025) 2200,5025 2270,4955 2455,4955 2475,4975 2525,4975 v1(2537.33,4962.67) ; CN16.20@3347,1289 3374,1289 3520,1435 3520,1834.14 3575,1889.14 3575,5025 3450,5150 CN11.16@3425,5150
D15: CN11.15 CN16.21 U1.G1 U2.G7 U8.79 | length 7001.7
  TopLayer w5: U2.G7@1523.43,5026.57 v1(1540,5010) ; U1.G1@2073.82,5051.18 2090,5035 v1(2090,5005) ; U8.79@2251.38,4454.13 2251.38,4681.67 2495,4925.29 2495,4945 2675,5125 3300,5125 CN11.15@3325,5150
  BottomLayer w5: v1(1540,5010) 1565,5010 1595,4980 2035,4980 2060,5005 2195,5005 2260,4940 2490,4940 v1(2505,4955) ; CN16.21@3247,1189 3298,1240 3375,1240 3530,1395 3530,1830 3585,1885 3585,5065 3450,5200 3375,5200 CN11.15@3325,5150
E5V: C81.1 JP13.6 U16.3 | length 2822.9
  TopLayer w20: C81.1@545,1225 v1(545,1275) ; v1(965,2475) 990,2500 1200,2500 JP13.6@1250,2550
  VCC w20: U16.3@-48.43,948.43 28.15,1025 400,1025 545,1170 545,1670 980,2105 980,2450 1030,2500 1200,2500 JP13.6@1250,2550
  other v1: 977.86,2487.86
GND: B1.1 B1.4 B3.1 B3.4 B4.1 B4.4 BOOT0.3 BOOT1.3 BT1.2 C1.1 C2.1 C3.1 C4.1 C5.1 C6.1 C7.1 C8.1 C9.1 C10.2 C11.2 C12.2 C13.1 C14.1 C15.1 C16.2 C17.2 C18.2 C19.2 C20.1 C21.1 C22.1 C23.2 C24.1 C25.2 C26.2 C27.1 C28.1 C31.1 C32.2 C33.2 C34.1 C35.2 C36.2 C37.2 C38.2 C39.1 C42.1 C43.2 C44.2 C45.2 C46.1 C47.2 C48.2 C49.1 C50.2 C51.1 C52.2 C53.2 C54.2 C55.1 C58.1 C59.2 C60.1 C61.2 C62.1 C63.1 C64.2 C65.2 C66.2 C68.2 C69.2 C71.2 C72.2 C73.2 C74.1 C75.1 C77.2 C78.1 C79.2 C81.2 C82.2 C83.2 C84.2 C86.2 C88.1 C89.2 C90.1 C94.1 C95.1 C96.1 C97.1 C98.1 C99.1 C100.1 CN1.2 CN1.4 CN1.6 CN1.8 CN1.10 CN1.12 CN1.16 CN1.18 CN1.20 CN1.22 CN1.24 CN1.30 CN1.32 CN2.1 CN2.2 CN2.3 CN2.4 CN3.1 CN3.2 CN3.3 CN3.4 CN4.0 CN4.3 CN4.6 CN5.1 CN5.2 CN5.3 CN5.4 CN6.13 CN6.14 CN7.3 CN7.5 CN7.9 CN7.11 CN7.13 CN7.15 CN7.17 CN7.19 CN8.0 CN8.5 CN9.4 CN9.6 CN9.8 CN9.10 CN9.12 CN9.14 CN9.16 CN9.18 CN9.20 CN10.1 CN10.10 CN10.19 CN10.30 CN10.39 CN10.50 CN10.59 CN10.70 CN11.1 CN11.10 CN11.30 CN11.39 CN11.50 CN11.59 CN11.70 CN12.0 CN12.5 CN13.6 CN13.9 CN13.G1 CN13.G2 CN13.G3 CN13.G4 CN14.4 CN15.1 CN16.22 CN16.26 CN16.27 CN18.5 CN18.17 JP5.1 JP8.1 JP14.1 JP18.1 JP21.2 LD1.2 LD2.2 LD3.2 LD4.2 LD5.2 R9.1 R25.2 R26.2 R34.2 R41.2 R47.2 R48.2 R52.1 R54.1 R63.1 R65.2 R72.2 R73.2 R74.1 R86.2 R95.1 R108.2 R117.1 R123.2 R124.1 R125.1 R136.2 R137.2 R138.2 RV1.0 RV1.1 T1.1 TP1.1 TP2.1 TP16.1 U1.D1 U1.E6 U2.E8 U2.H2 U2.H7 U3.13 U3.36 U4.2 U5.15 U6.4 U7.15 U8.16 U8.30 U8.38 U8.51 U8.61 U8.71 U8.83 U8.94 U8.107 U8.120 U8.130 U8.143 U9.4 U9.5 U9.6 U9.7 U10.3 U10.16 U10.22 U11.2 U12.1 U13.8 U16.4 U16.5 U16.6 U17.2 U17.4 U17.14 U17.22 U18.1 U18.8 | length 23142.7
  TopLayer w8: R95.1@277.5,4350 C78.1@277.5,4425 ; v1(350,4450) R136.2@350,4497.5 ; v1(350,5075) R137.2@350,5147.5 ; v1(350,5725) R138.2@350,5797.5 ; C74.1@400,3900 U11.2@400,3993.7 ; v1(425,6200) BT1.2@586.42,6200 ; v1(475,350) LD5.2@475,397.5 ; B1.1@522.83,37.5 B1.4@877.17,37.5 ; R65.2@625,2252.5 v1(662.5,2252.5) 675,2265 T1.1@712.5,2265 ; C81.2@705,1225 v1(775,1225) ; v1(825,650) C94.1@872.5,650 ; v1(825,875) C89.2@872.5,875 ; C86.2@872.5,1025 C83.2@872.5,1100 ; C82.2@885,1325 U17.2@1050,1325 ; v1(925,3075) C49.1@925,3122.5 ; C37.2@925,3697.5 997.5,3697.5 1025.59,3725.59 U7.15@1025.59,3776.97 ; C24.1@925,4222.5 v1(962.5,4222.5) ; v1(935,3930) C28.1@972.5,3930 ; v1(975,3340) C39.1@975,3372.5 ; v1(1025,4275) 1025.59,4275.59 U5.15@1025.59,4326.97 ; v1(1050,675) U17.14@1050,725 ; U17.4@1050,1225 v1(1125,1225) ; v1(1075,1600) U12.1@1173.82,1600 ; v1(1075,3165) U9.7@1075,3225 ; v1(1125,3165) U9.6@1125,3225 ; v1(1150,4950) C15.1@1150,4997.5 ; 1150,5655 1321.39,5655 ; U9.4@1175,3000 v1(1205,3000) ; v1(1175,3165) U9.5@1175,3225 ; v1(1200,3340) C42.1@1200,3372.5 ; C31.1@1202.5,3925 v1(1250,3925) ; R34.2@1302.5,3750 v1(1350,3750) ; C61.2@1325,2100 v1(1325,2275) ; v1(1326.57,4956.57) U2.H2@1326.57,4987.2 ; v1(1350,1550) C69.2@1350,1615 ; v1(1365,5450) C10.2@1397.5,5450 ; 1375,2952.09 1375,3005 ; 1380,2925 1483.92,2925 ; 1422.5,3977.5 1522.5,3977.5 1543.9,3956.1 v1(2088.9,3956.1) ; U17.22@1450,1075 v1(1525,1075) ; v1(1500,1525) C73.2@1565,1525 ; C25.2@1500,4177.5 1520,4177.5 1544.55,4152.95 1930.16,4152.95 v1(1956.1,4178.9) 1956.1,4501.1 1977.5,4522.5 C18.2@1977.5,4550 ; C35.2@1500.2,3700.2 1719.8,3700.2 ; U2.H7@1523.43,4987.2 v1(1540,4970.63) ; v1(1550,1725) C66.2@1597.5,1725 ; v1(1560,2125) R72.2@1597.5,2125 ; U2.E8@1562.8,5105.32 v1(1595,5105.32) ; C43.2@1575,3377.5 C44.2@1650,3377.5 ; 1599.67,355 1599.67,388.56 1618.29,407.18 ; 1610,3242.4 v1(1610,3377.5) ; C88.1@1650,1000 v1@1697.5,1000 ; C90.1@1652.5,800 R108.2@1652.5,850 v1(1700,850) ; C14.1@1700,5277.5 1737.5,5277.5 v1(1750,5265) ; U8.107@1700.2,4454.13 C17.2@1700.2,4547.7 ; C84.2@1710,1125 v1(1775,1125) ; v1(1750,2775) C60.1@1797.5,2775 ; v1(1750,5750) C1.1@1750,5797.5 ; v1(1775,1900) C62.1@1822.5,1900 ; v1(1800,1625) 1806.1,1631.1 U10.16@1830.51,1631.1 ; v1(1825,375) LD4.2@1825,422.5 ; v1(1825,5750) C3.1@1825,5797.5 ; 1834.36,1154.53 1870,1118.89 1870,980 ; B3.1@1872.83,37.5 v1(2297.5,37.5) ; 1885,3140 1885,3250 1995,3360 v1(2015,3360) ; 1892.04,3185 1892.04,3257.04 ; v1(1900,1400) C75.1@1900,1450 ; C2.1@1900,5852.5 v1(1900,5900) ; v1(1925,375) LD3.2@1925,422.5 ; v1(1925,1985) C55.1@1925,2022.5 ; C38.2@1947.5,3475 1947.5,3517.5 1975.79,3545.79 1975.79,3645.79 1980,3650 2050,3650 2075,3675 2235,3675 2251.38,3658.62 U8.30@2251.38,3595.87 ; R123.2@1952.5,600 v1(1952.5,647.5) ; U10.22@1954.53,1605.51 1954.53,1550 v1(1962.21,1542.32) 1975,1529.53 R86.2@1975,1502.5 ; U10.3@1954.53,1794.49 1954.53,1834.53 v1(1955,1835) ; C79.2@1960,1350 v1(2025,1350) ; v1(1960,4825) C16.2@1997.5,4825 ; v1(1975,5750) C4.1@1975,5797.5 ; v1(1977.5,3177.5) C47.2@1977.5,3225 C48.2@2072.5,3225 ; U1.D1@1985.24,5051.18 1999.06,5065 v1(2000,5065) ; U1.E6@2014.76,5198.82 2014.76,5264.76 v1(2102.5,5352.5) C12.2@2102.5,5400 ; v1(2025,375) LD2.2@2025,422.5 ; C63.1@2025,1902.5 v1(2025,1935) ; v1(2050,5750) C5.1@2050,5797.5 ; R124.1@2072.5,600 v1(2072.5,647.5) ; v1(2125,375) LD1.2@2125,422.5 ; 2129.82,5643.71 2151.11,5665 ; v1(2150,1985) C58.1@2150,2022.5 ; v1(2172.64,4242.64) C19.2@2172.64,4545.14 ; R73.2@2175,1902.5 v1(2175,1935) ; C6.1@2200,5852.5 v1(2200,5900) ; C59.2@2225,2077.5 v1(2225,2125) ; v1(2225,3275) R41.2@2225,3322.5 ; v1(2275,650) C95.1@2275,697.5 ; v1(2292.05,4152.95) 2497.05,4152.95 2527.5,4122.5 C26.2@2550,4122.5 ; v1(2300,3275) C45.2@2300,3322.5 ; v1(2310,3955) 2311.1,3956.1 2503.9,3956.1 2530,3930 C33.2@2545,3930 ; v1(2350,650) C96.1@2350,702.5 ; C11.2@2350,5502.5 2350,5525 v1(2375,5550) ; 2375,4295 2375,4333.74 2391.07,4349.8 C23.2@2547.7,4349.8 ; 2397.64,3760 2397.64,3716.25 2413.69,3700.2 2494.8,3700.2 2522.5,3672.5 C36.2@2550,3672.5 ; R63.1@2417.5,2975 v1(2450,2975) ; C22.1@2417.5,3050 v1@2455,3050 ; C13.1@2417.5,3125 v1@2455,3125 ; C9.1@2417.5,3200 v1(2450,3200) ; 2420.08,5425 2886.11,5425 2900,5438.89 ; v1(2425,650) C97.1@2425,697.5 ; C46.1@2450,3377.5 v1(2450,3410) ; v1(2500,650) C98.1@2500,697.5 ; v1(2550,1950) R74.1@2550,1997.5 ; C23.2@2550,4347.5 2587.5,4347.5 2610,4370 ; v1(2575,650) C99.1@2575,697.5 ; 2625,4435 C20.1@2625,4547.5 2647.5,4547.5 2665,4565 2665,4639.62 v1(2674.95,4649.58) ; R125.1@2650,752.5 v1(2650,800) ; C7.1@2650,5852.5 v1(2650,5900) ; v1(2675,4800) 2686.22,4788.78 2686.22,4661.22 ; U3.36@2685,5525 2685,5565 ; 2686.22,5425 U3.36@2686.22,5512.4 ; v1(2700,875) R117.1@2747.5,875 ; C34.1@2722.5,3800 v1(2722.5,3847.5) ; v1(2725,5760) C8.1@2725,5797.5 ; v1@2735,1897.5 v1(2737.5,1897.5) ; C27.1@2925,3997.5 2942.5,3980 v1(2960,3980) ; v1(2925,4110) U4.2@2925,4175 ; v1(3025,3540) U6.4@3025,3575 ; C100.1@3102.5,2425 v1(3250,2425) ; B4.1@3222.83,37.5 B4.4@3577.17,37.5 ; C52.2@3527.5,2150 3575.79,2150 v1(3625.39,2199.61) CN13.6@3676.65,2199.61 ; v1(3600,5725) R9.1@3647.5,5725 ; v1(3615,2525) C51.1@3647.5,2525 ; v1(3615,2825) R54.1@3647.5,2825 ; v1(3615,2925) R52.1@3647.5,2925 ; v1(3615,3125) R47.2@3647.5,3125 ; v1(3625,2325) CN13.9@3675,2325 ; v1(3700,925) C71.2@3700,985 ; RV1.1@3725,575 C77.2@3725,740 ; v1(3760,3125) R48.2@3797.5,3125 ; v1(3800,1075) C72.2@3897.5,1075 ; v1(3800,1150) C68.2@3897.5,1150 ; CN7.3@3805,3300 v1(3900,3300) ; CN7.5@3805,3350 v1(3900,3350) ; CN7.9@3805,3450 v1(3900,3450) ; CN7.11@3805,3500 v1(3900,3500) ; CN7.13@3805,3550 v1(3900,3550) ; CN7.15@3805,3600 v1(3900,3600) ; CN7.17@3805,3650 v1(3900,3650) ; CN7.19@3805,3700 v1(3900,3700) ; U13.8@4075,1086.81 4136.81,1086.81 v1(4150,1100)
  TopLayer w10: 975,2602.5 1320,2602.5 ; 1327.5,2600 1480,2600
  BottomLayer w8: CN10.19@625,4950 675,4900 747.91,4900 ; 954.39,5660 954.39,5754.39 1257.5,6057.5 1350,6057.5 ; 1129,5083.38 1150,5062.38 v1(1150,4950) ; 1130,5241.11 1338.89,5450 v1(1365,5450) ; v1(1700.2,4510) 1660,4469.8 1660,4226.11 1695.61,4190.5 1695.61,4155 1705,4145.61 1705,3712.5 ; 1720,5622.5 2367.5,5622.5 ; CN18.17@1850,716.54 v1(1850,775) ; 1870,1500 1870,1585 1897.5,1612.5 1915,1612.5 ; 1995,945 1995,1015 2040,1060 v1(2180,1060) ; v1(2205,5360) v1@2210,5360 ; 2221.09,5690.02 2241.11,5670 2585,5670 ; v1(2297.5,37.5) CN18.5@2342.5,37.5 ; 2410,3580 2385,3605 2385,3803.68 2480,3898.68 2480,3962.04 ; 2430,3570 2430,3741.11 2468.89,3780 ; 2645,4395 2674.95,4424.95 v1(2675,4800) ; v1(2800,4475) 2800,4100 2807.5,4092.5 2807.5,3955 ; v1@2925,4105.98 v1(2925,4110) 2960,4075 v1(2960,3980) ; 2972.5,3580 2950,3557.5 2950,3400 BOOT1.3@2975,3375 ; 3960,1005 3960,955 3990,925 4050,925
  BottomLayer w10: 1130,5171 1139.43,5180.43 1139.43,5250.53 ; 1150,5062.38 1130,5082.38 1130,5251.11 1173.74,5294.85 ; 1633.89,5680 1643.89,5670 2791.11,5670 2803.61,5657.5 ; 1652.94,3814.05 v1(1663.89,3825) v1@1665,3825 ; 1660,4335 1660,4469.8 v1(1700.2,4510) ; 1697.86,4500 1667.5,4469.64 1667.5,4357.5 1660,4350 1660,4178.89 1703.89,4135 1705,4135 ; 1709.89,4029.89 1709.89,4129 ; 2545,5670 2568.89,5670 2581.39,5657.5 ; 2637.5,4150 2637.5,4208.24 ; 2792.5,5665 2600,5665 ; 3633.55,4080 3633.55,4094.66 3661.73,4122.84 ; 2600,5665 2600,5670 2600,5665
  other v1: 745,37.5 1975,37.5 3400,37.5 2440,280 2360,310 2580,455 1460,575 2860,600 3500,840 1700,1000 3500,1000 872.5,1065 1645,1180 1271.41,1182.52 3060,1200 3500,1200 975,1325 3060,1405 2760,1420 2700,1500 3075,1600 3075,1820 1515,1850 2650,1870 1680,1930 2475,1950 1850,2125 1750,2175 1540,2670 2845,2840 2450,3050 1615,3060 2625,3060 2450,3125 1360,3165 1959.5,3529.5 2245,3665 2512.24,3682.76 1540,3700.2 1025,3725 1705,3740 2512.5,3947.5 400,3950 1531.8,3968.2 1225,4120 2513.45,4136.55 1532.31,4165.19 1100,4205 3610,4240 2505,4349.8 277.5,4390 3735,4400 1969.87,4514.87 2172.64,4520 3735,4620 2925,4650 1140,4848.89 3675,4960 1790,5027.5 960,5040 560,5100 3500,5220 960,5340 1105,5360 960,5640 3070,5680 1115,5840 2000,5920 1295,6040 1520,6320
NC: U3.1 U3.2 U3.3 U3.4 U3.5 U3.6 U3.10 U3.11 U3.14 U3.15 U3.20 U3.21 U3.22 U3.23 U3.24 U3.25 U3.26 U3.27 U3.28 U3.33 U3.34 U3.35 U3.38 U3.39 U3.40 U3.45 U3.46 U3.47 U3.48
NetB3_2: B3.2 B3.3 C92.2 R111.1 R121.1 | length 1105.9
  TopLayer w5: B3.2@1872.83,212.5 B3.3@2227.17,212.5 2227.17,447.83 2100,575 2100,650 2072.5,677.5 R111.1@2072.5,900